# EAGLE board v2 (EAGLE 5.11)
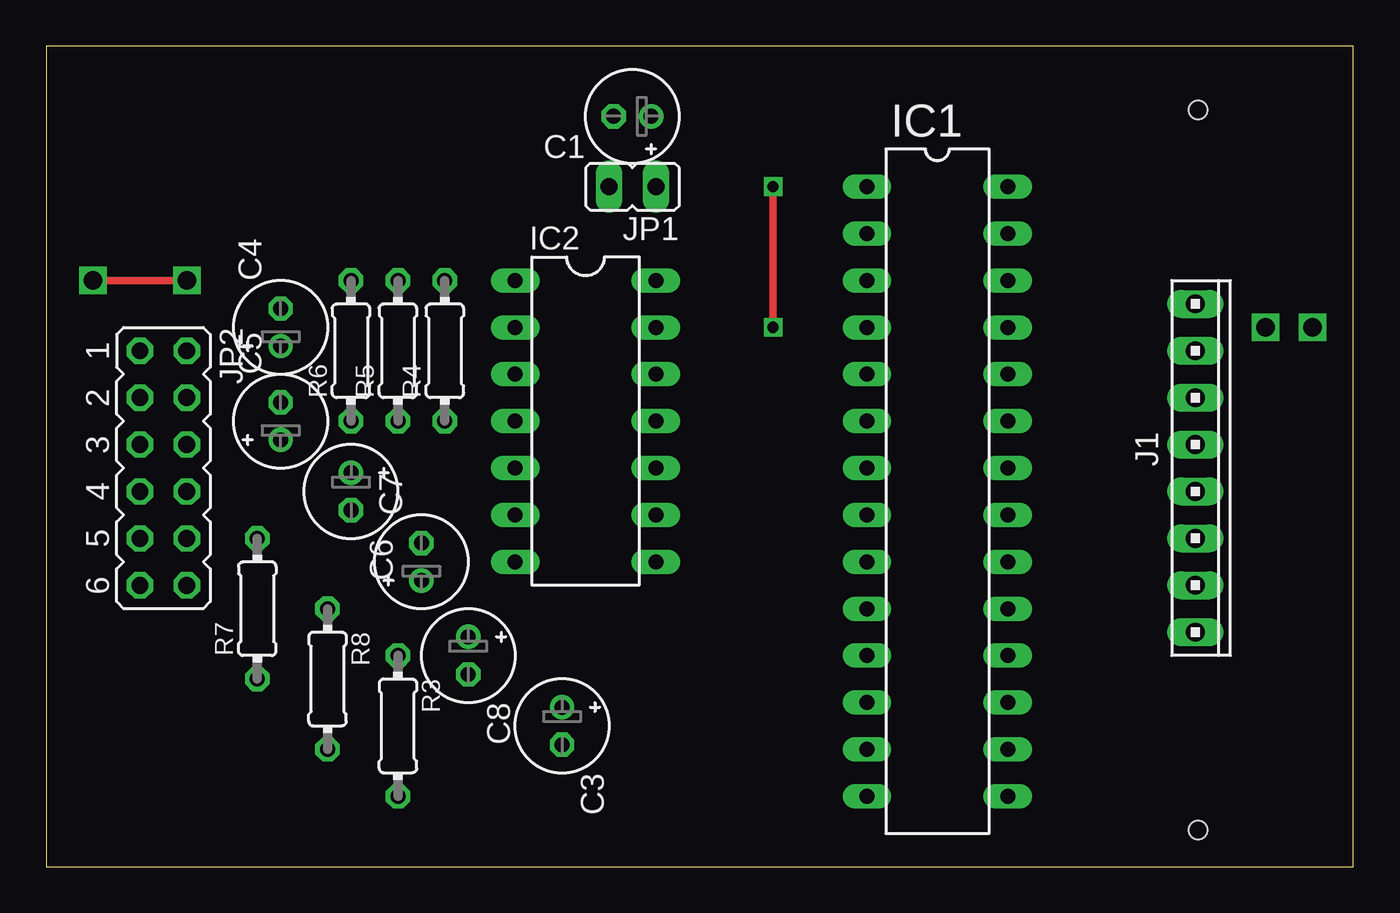
[diagram p0: board, top side]
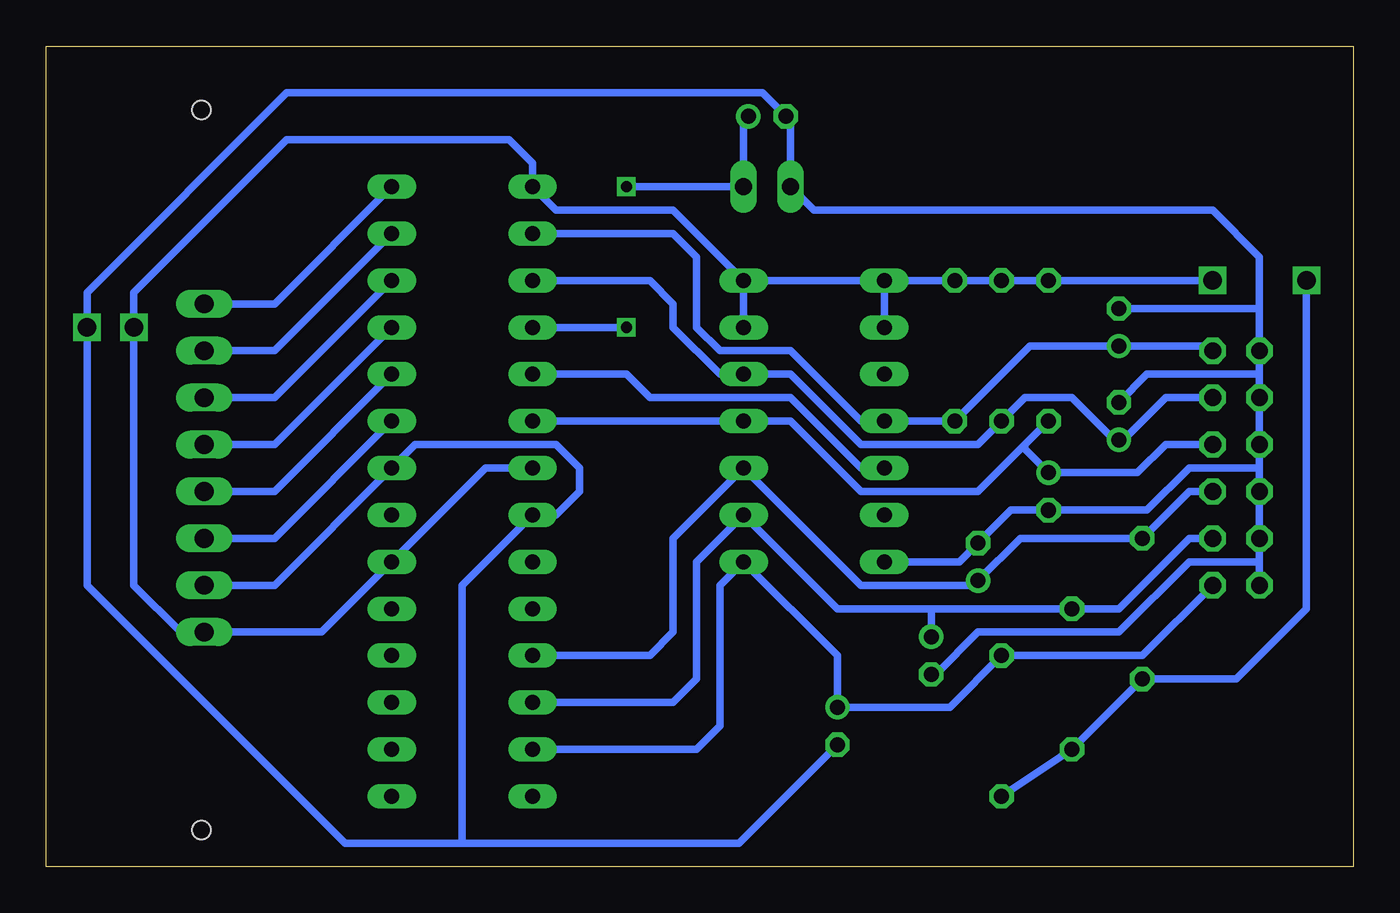
[diagram p1: board, bottom side, seen from below]

Size 70.79 x 44.44 mm. Coordinates in mm from the lower left corner, seen from the top.
Outline: 0,0 70.79,0 70.79,44.44 0,44.44 0,0
Copper layers (1*16): Top 0.035mm / dielectric 1.5mm / Bottom 0mm
Design rules "default *": minimum track width 10mil, minimum drill 24mil, track to track 8mil, track to pad 8mil, pad to pad 8mil, via to via 8mil, smd to smd 8mil, copper to edge 40mil, drill to drill 8mil, minimum pad ring 10mil, minimum via ring 8mil, stop-mask expansion 4mil, vias tented up to drill 0mil, thermal gap 10mil
Holes 1 mm at 62.38,40.98 62.38,1.98

## Footprints (pad centres in the part's own frame; a part is rotated, then mirrored left to right if it is on the bottom)
E2-5 = drill 0.813 pad 1.27 round: + -1.016,0 | drill 0.813 pad 1.27 octagon: - 1.016,0
DIL28-3 = drill 0.813 long: 1 -16.51,-3.81; 2 -13.97,-3.81; 3 -11.43,-3.81; 4 -8.89,-3.81; 5 -6.35,-3.81; 6 -3.81,-3.81; 7 -1.27,-3.81; 8 1.27,-3.81; 9 3.81,-3.81; 10 6.35,-3.81; 11 8.89,-3.81; 12 11.43,-3.81; 13 13.97,-3.81; 14 16.51,-3.81; 15 16.51,3.81; 16 13.97,3.81; 17 11.43,3.81; 18 8.89,3.81; 19 6.35,3.81; 20 3.81,3.81; 21 1.27,3.81; 22 -1.27,3.81; 23 -3.81,3.81; 24 -6.35,3.81; 25 -8.89,3.81; 26 -11.43,3.81; 27 -13.97,3.81; 28 -16.51,3.81
DIL14 = drill 0.813 long: 1 -7.62,-3.81; 2 -5.08,-3.81; 3 -2.54,-3.81; 4 0,-3.81; 5 2.54,-3.81; 6 5.08,-3.81; 7 7.62,-3.81; 8 7.62,3.81; 9 5.08,3.81; 10 2.54,3.81; 11 0,3.81; 12 -2.54,3.81; 13 -5.08,3.81; 14 -7.62,3.81
10X08MTA = drill 1.016 long: 1 8.89,0; 2 6.35,0; 3 3.81,0; 4 1.27,0; 5 -1.27,0; 6 -3.81,0; 7 -6.35,0; 8 -8.89,0
JP1 = drill 0.914 long: 1 0,-1.27; 2 0,1.27
JP6Q = drill 0.914 octagon: 1 -6.35,-1.27; 2 -6.35,1.27; 3 -3.81,-1.27; 4 -3.81,1.27; 5 -1.27,-1.27; 6 -1.27,1.27; 7 1.27,-1.27; 8 1.27,1.27; 9 3.81,-1.27; 10 3.81,1.27; 11 6.35,-1.27; 12 6.35,1.27
0204/7 = drill 0.813 octagon: 1 -3.81,0; 2 3.81,0

## Placement (x,y rotation side)
C1  [E2-5]  31.75,40.64 180 top
C3  [E2-5]  27.94,7.62 270 top
C4  [E2-5]  12.7,29.21 90 top
C5  [E2-5]  12.7,24.13 90 top
C6  [E2-5]  16.51,20.32 270 top
C7  [E2-5]  20.32,16.51 90 top
C8  [E2-5]  22.86,11.43 270 top
IC1  MEGA8-P  [DIL28-3]  48.26,20.32 270 top
IC2  74HC280N  [DIL14]  29.21,24.13 270 top
J1  [10X08MTA]  62.23,21.59 270 top
JP1  [JP1]  31.75,36.83 90 top
JP2  [JP6Q]  6.35,21.59 270 top
R3  [0204/7]  19.05,7.62 270 top
R4  [0204/7]  21.59,27.94 90 top
R5  [0204/7]  19.05,27.94 90 top
R6  [0204/7]  16.51,27.94 90 top
R7  [0204/7]  11.43,13.97 90 top
R8  [0204/7]  15.24,10.16 270 top

## Library data of the parts
C1 C3-C8 R3-R8 = rcl
IC1 = atmel; OC_FARNELL: unknown; OC_NEWARK: unknown
IC2 = 74xx-eu
J1 = con-amp; OC_FARNELL: unknown; OC_NEWARK: unknown
JP1 JP2 = jumper

## Nets
GND: C1.- C3.- C4.- C5.- C6.- C7.- C8.- IC1.8 IC1.22 IC2.7 J1.2 JP1.2 JP2.1 JP2.3 JP2.5 JP2.7 JP2.9 JP2.11
N$1: IC1.23 J1.3
N$2: IC1.24 J1.4
N$3: IC1.25 J1.5
N$4: IC1.26 J1.6
N$5: IC1.27 J1.7
N$6: IC1.28 J1.8
N$7: IC1.5 IC2.5
N$9: C3.+ IC1.13 IC2.8 JP2.12 R3.1
N$10: C5.+ IC1.3 IC2.12 JP2.4 R5.1
N$11: C7.+ IC1.11 IC2.10 JP2.8 R7.2
N$12: C6.+ IC1.6 IC2.11 JP2.6 R6.1
N$14: C4.+ IC1.2 IC2.4 JP2.2 R4.1
N$15: C8.+ IC1.12 IC2.9 JP2.10 R8.1
VCC: IC1.1 IC1.7 IC1.20 IC2.1 IC2.2 IC2.13 IC2.14 J1.1 R3.2 R4.2 R5.2 R6.2 R7.1 R8.2
WHEEL_SENSOR: C1.+ IC1.4 JP1.1

## Tracks (layer width: path | path; a pad name or v marks a point on that pad's centre or on a via)
GND  (via drill 1 pad 1.27)
  Bottom 0.406: 5.08,30.23 JP2.1 5.08,26.67 | 5.08,21.59 JP2.7 JP2.9 5.08,16.51 | 5.08,21.59 JP2.5 JP2.3 5.08,26.67 | JP2.11 5.08,16.51 | 5.08,30.23 C4.- | 5.08,30.23 5.08,33.02 7.62,35.56 29.21,35.56 JP1.2 30.48,40.39 C1.- 32,41.91 57.77,41.91 68.58,31.1 v68.58,29.21 68.58,15.24 54.61,1.27 48.26,1.27 | C8.- 22.61,10.41 20.32,12.7 12.7,12.7 8.89,16.51 5.08,16.51 | C5.- 11.18,26.67 5.08,26.67 | 5.08,21.59 8.89,21.59 11.18,19.3 C6.- 18.54,19.3 C7.- 21.34,16.51 IC2.7 | J1.2 58.42,15.24 IC1.22 50.8,22.86 43.18,22.86 41.91,21.59 41.91,20.32 43.18,19.05 IC1.8 48.26,15.24 48.26,1.27 | C3.- 33.27,1.27 48.26,1.27
N$1
  Bottom 0.406: IC1.23 58.42,17.78 J1.3
N$2
  Bottom 0.406: IC1.24 58.42,20.32 J1.4
N$3
  Bottom 0.406: IC1.25 58.42,22.86 J1.5
N$4
  Bottom 0.406: IC1.26 58.42,25.4 J1.6
N$5
  Bottom 0.406: IC1.27 58.42,27.94 J1.7
N$6
  Bottom 0.406: IC1.28 58.42,30.48 J1.8
N$7
  Bottom 0.406: IC2.5 26.67,21.59 30.48,25.4 38.1,25.4 39.37,26.67 IC1.5
N$9
  Bottom 0.406: IC1.13 35.56,6.35 34.29,7.62 34.29,15.24 IC2.8 27.94,11.43 C3.+ 21.84,8.64 R3.1 11.43,11.43 JP2.12
N$10
  Bottom 0.406: IC1.3 38.1,31.75 36.83,30.48 36.83,29.21 34.29,26.67 IC2.12 30.48,26.67 26.67,22.86 20.32,22.86 R5.1 17.78,25.4 15.24,25.4 12.7,22.86 | JP2.4 10.16,25.4 12.7,22.86 | 12.7,22.86 C5.+
N$11
  Bottom 0.406: IC1.11 38.1,11.43 36.83,12.7 36.83,17.78 IC2.10 26.67,15.24 20.57,15.24 C7.+ 18.03,17.78 R7.2 8.89,20.32 JP2.8
N$12
  Bottom 0.406: IC1.6 IC2.11 30.48,24.13 26.67,20.32 20.32,20.32 17.78,22.86 | 17.78,22.86 R6.1 | JP2.6 10.16,22.86 11.68,21.34 C6.+ 17.78,22.61 17.78,22.86
N$14
  Bottom 0.406: IC1.2 36.83,34.29 35.56,33.02 35.56,29.21 34.29,27.94 30.48,27.94 26.67,24.13 IC2.4 R4.1 17.53,28.19 C4.+ 7.87,28.19 JP2.2
N$15
  Bottom 0.406: IC1.12 36.83,8.89 35.56,10.16 35.56,16.51 IC2.9 27.94,13.97 22.86,13.97 | 22.86,13.97 R8.1 12.7,13.97 8.89,17.78 JP2.10 | 22.86,13.97 C8.+
VCC  (via drill 1, 1 pad 1.27)
  Top 0.406: v2.54,31.75 v7.62,31.75
  Bottom 0.406: IC2.14 IC2.13 | IC2.1 IC2.14 | IC1.7 46.99,21.59 IC1.20 55.88,12.7 J1.1 63.5,12.7 66.04,15.24 v66.04,29.21 66.04,31.1 57.77,39.37 45.72,39.37 44.45,38.1 IC1.1 43.18,35.56 36.83,35.56 IC2.14 | IC2.1 IC2.2 | IC2.1 R4.2 R5.2 R6.2 v7.62,31.75 | v2.54,31.75 2.54,13.97 6.35,10.16 R7.1 R8.2 R3.2
WHEEL_SENSOR  (via drill 0.6)
  Top 0.406: v39.37,29.21 v39.37,36.83
  Bottom 0.406: v39.37,29.21 IC1.4 | v39.37,36.83 JP1.1 33.02,40.39 C1.+